# Altium PCB PCB.PcbDoc
Units mm, origin at the board's own origin, x right, y up, seen from the top; angles counter-clockwise.
Board outline 100.01 x 69.88 mm, 2 copper layers (Top Layer, Bottom Layer); 43 components, 85 nets, 137 pads, 95 vias.
Unrouted connection lines stored in the file: 41.
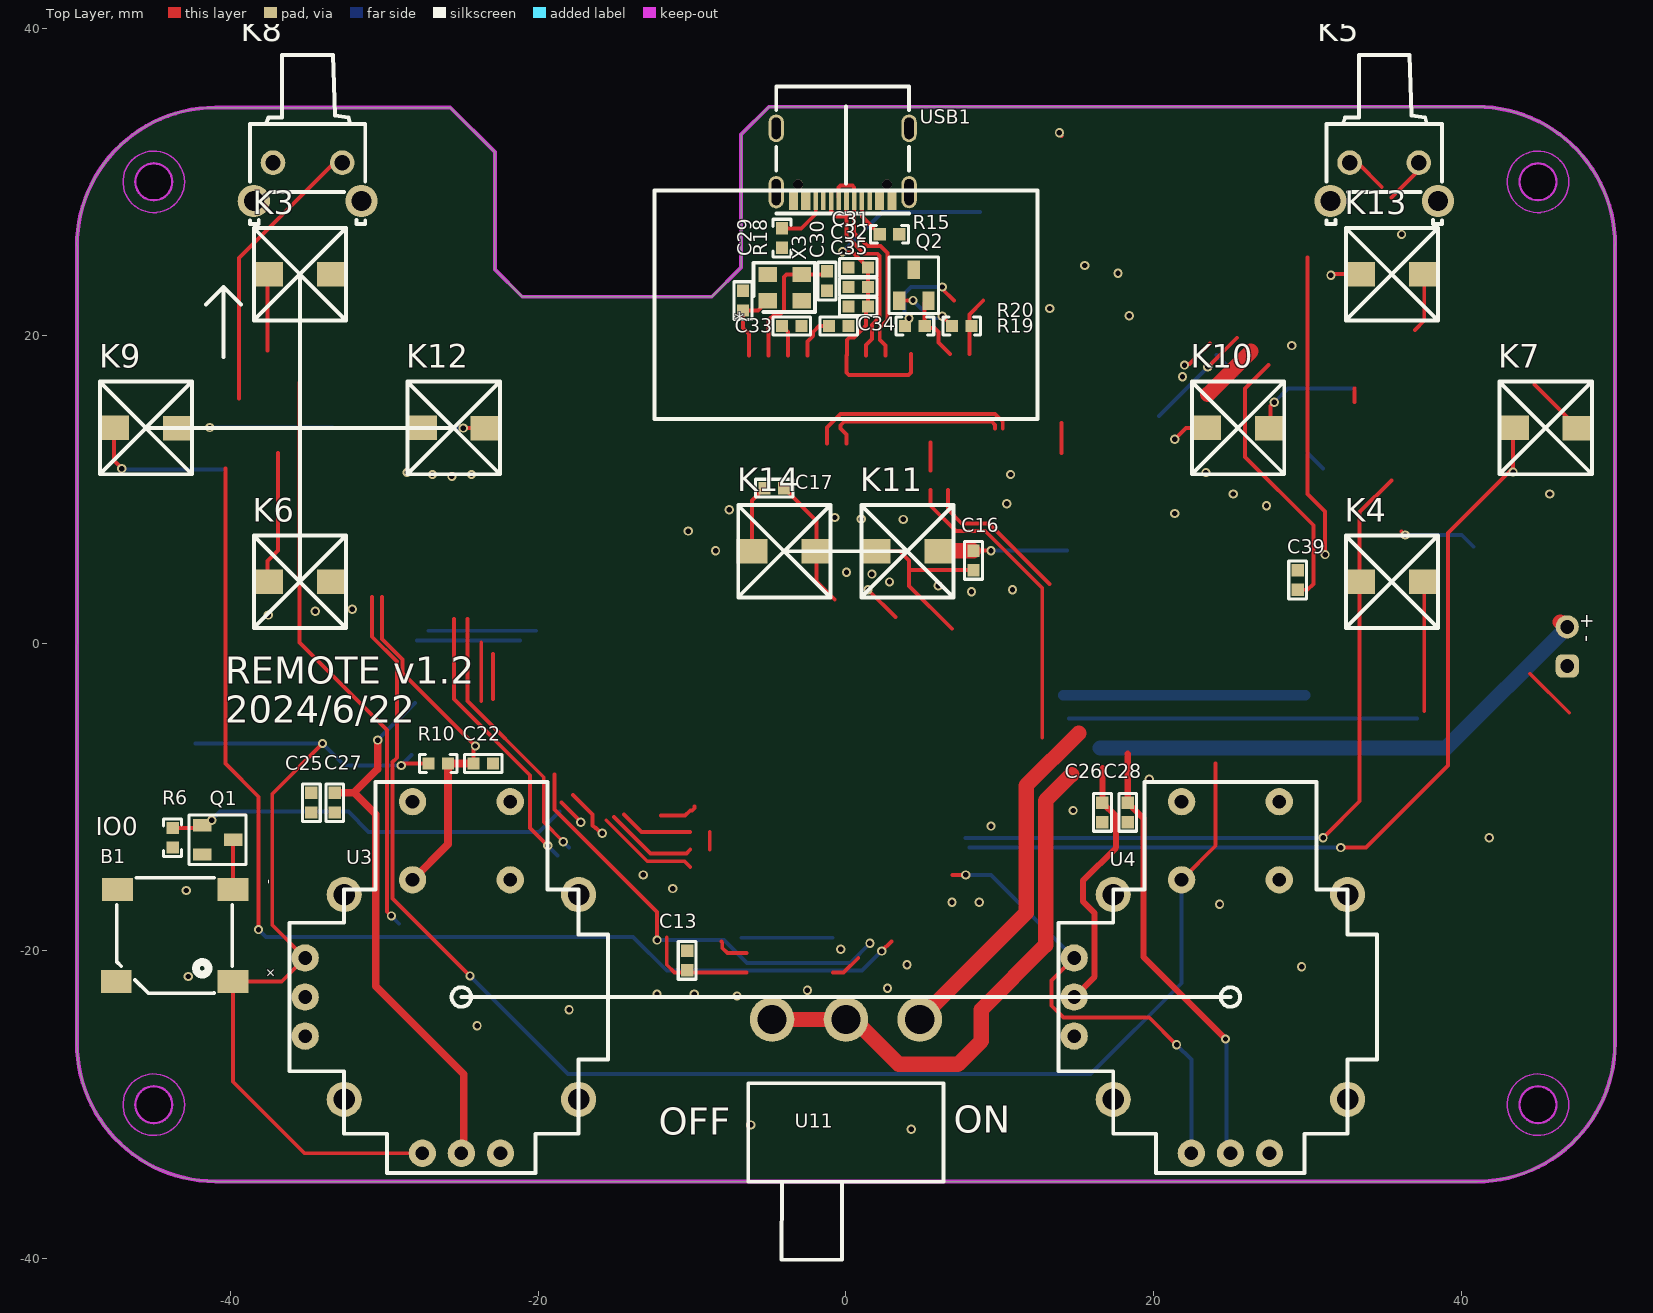
[diagram p0: Top Layer view]
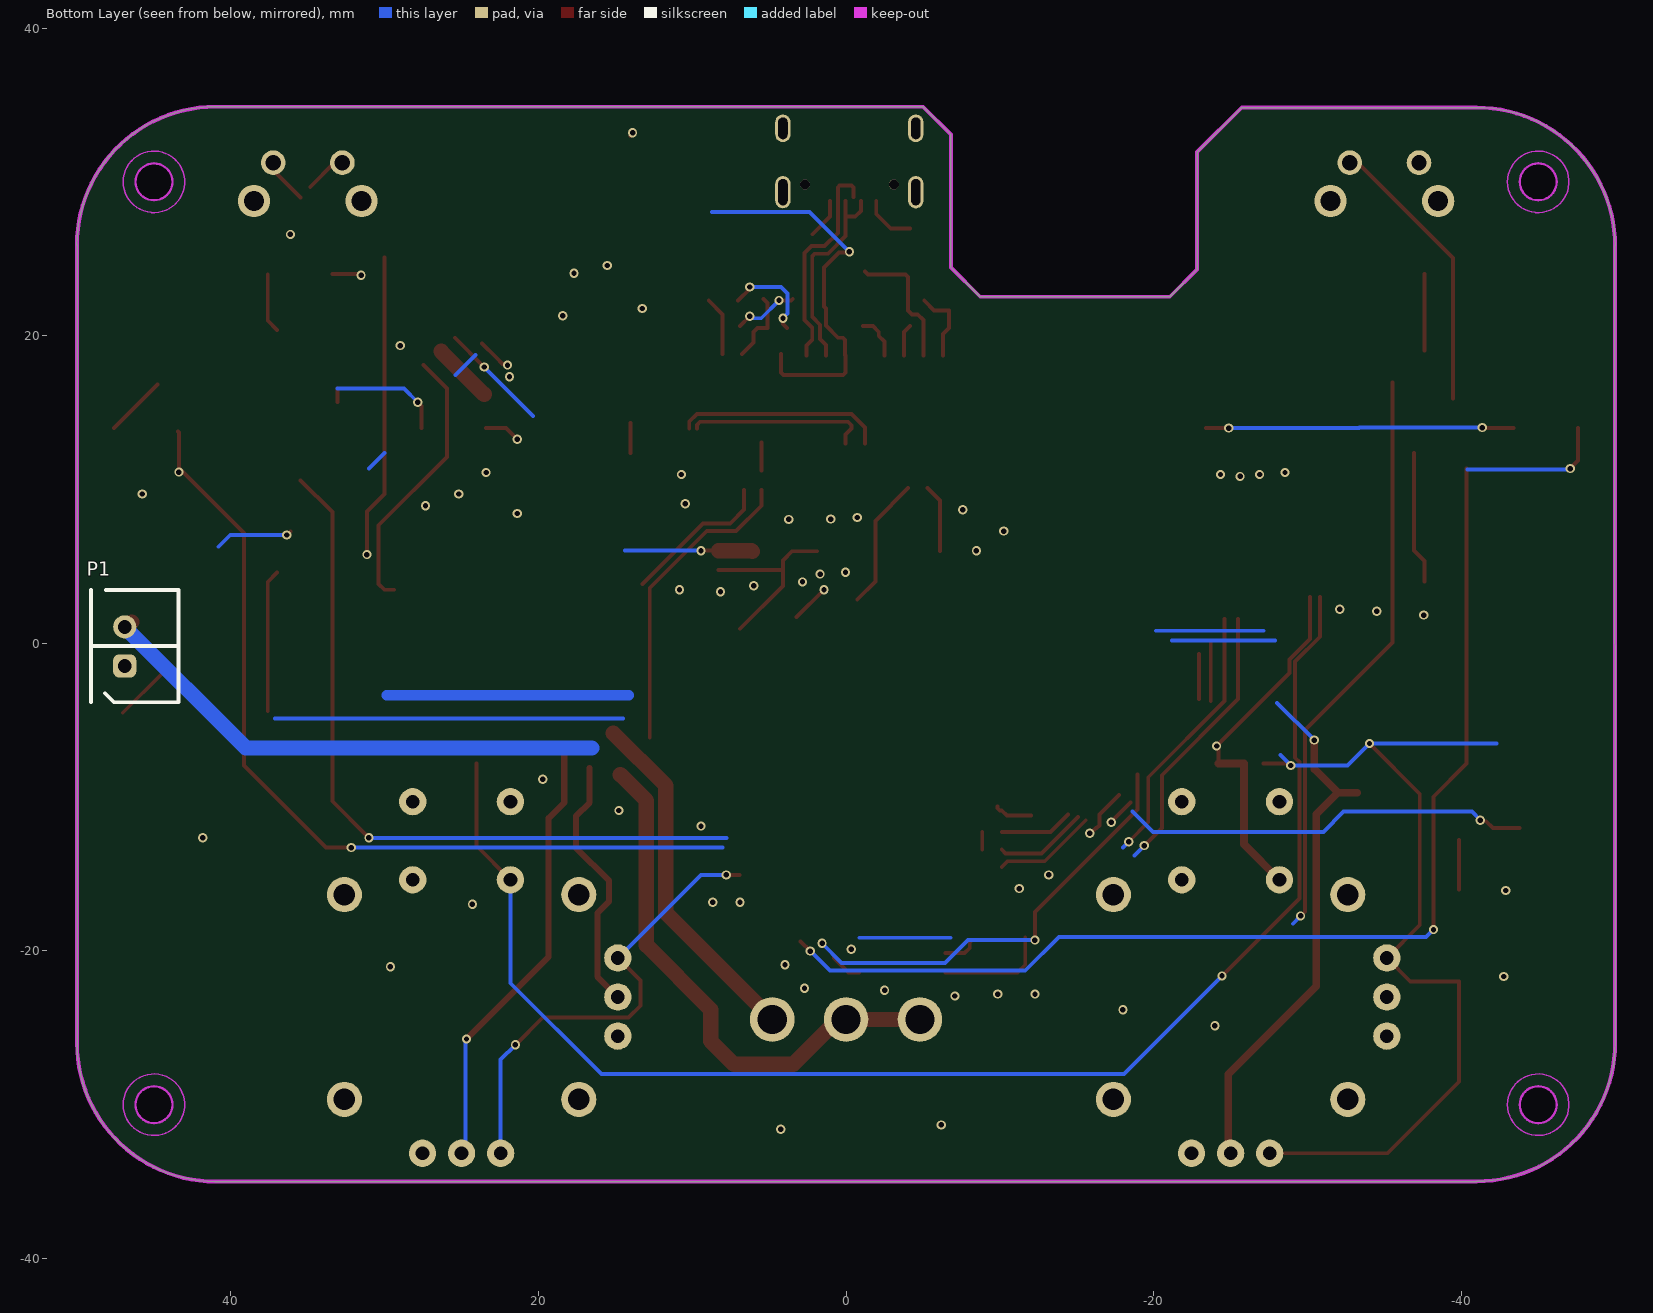
[diagram p1: Bottom Layer view, seen from below]
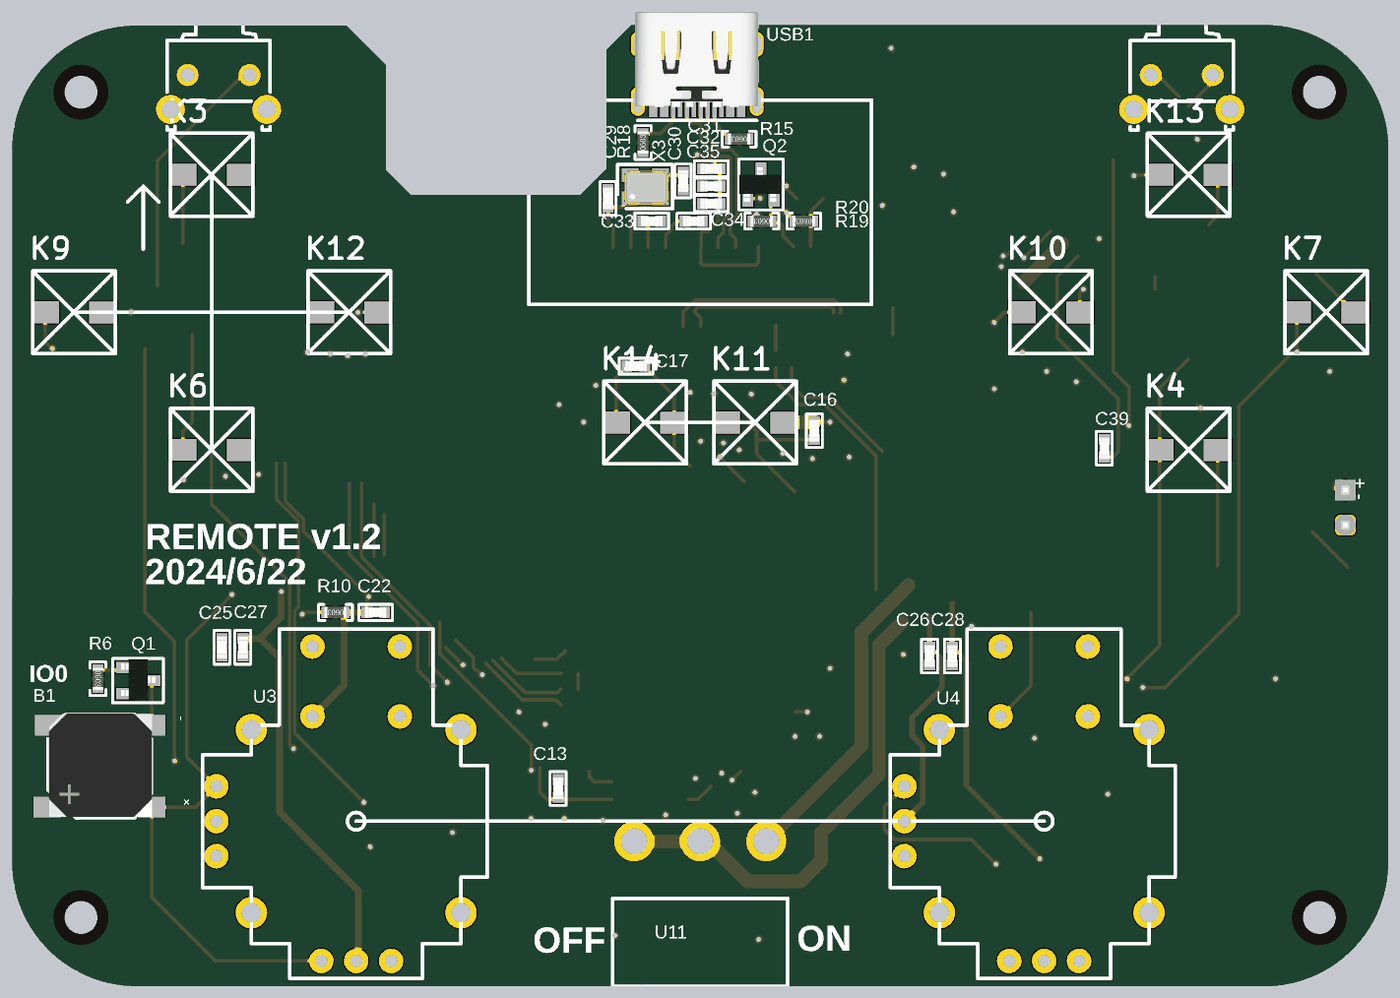
[diagram p2: 3D render of the assembled board from above, using the file's embedded part models]

## Layer stack, top to bottom
Top Solder: solder mask 0.0102, Solder Resist, Dk 3.5
Top Layer: signal copper 0.0356
Dielectric 1: dielectric 0.32, FR-4, Dk 4.8
Bottom Layer: signal copper 0.0356
Bottom Solder: solder mask 0.0102, Solder Resist, Dk 3.5

## Board outline
-50,-25.983 ccw(c-41,-25.983) -41,-34.983 -41,-35 41.059,-35 41,-35 ccw(c41,-26) 50,-26 50,25.895 50.011,25.884 ccw(c41.011,25.884) 41.011,34.884 -5.008,34.884 -6.82,33.072 -6.82,24.436 -8.725,22.531 -21.044,22.531 -22.822,24.309 -22.822,31.929 -25.726,34.833 -41,34.833 ccw(c-41,25.833) -50,25.833 -49.98,25.833
cut-out: 43.8,-30 ccw(c45,-30) 45,-31.2 ccw(c45,-30) 46.2,-30 ccw(c45,-30) 45,-28.8 ccw(c45,-30)
cut-out: -46.2,-30 ccw(c-45,-30) -45,-31.2 ccw(c-45,-30) -43.8,-30 ccw(c-45,-30) -45,-28.8 ccw(c-45,-30)
cut-out: -45,28.8 cw(c-45,30) -46.2,30 cw(c-45,30) -45,31.2 cw(c-45,30) -43.8,30 cw(c-45,30)
cut-out: 43.8,30 ccw(c45,30) 45,28.8 ccw(c45,30) 46.2,30 ccw(c45,30) 45,31.2 ccw(c45,30)

## Design rules (kind name [scope] priority, off if disabled: settings)
Clearance [All] p1: gap=0.1 ignorepadtopadclearanceinfootprint=FALSE except(0: Arc-Hole Track-Hole SMDPad-Hole THPad-Hole Via-Hole Fill-Hole Poly-Hole Region-Hole Text-Hole; 0.102: Arc-Arc Arc-Track Arc-SMDPad Arc-THPad Track-Track Track-SMDPad Track-THPad SMDPad-SMDPad SMDPad-THPad THPad-THPad; 0.127: Arc-Via Track-Via SMDPad-Via SMDPad-Text THPad-Via Via-Via; 0.254: Arc-Text Track-Text THPad-Text Via-Text Fill-Text Poly-Text Region-Text Text-Text)
DiffPairsRouting [All] p1: maxlimit=0.254 minlimit=0.1 mostfreqgap=0.254 toplayer_minwidth=0.2 toplayer_maxwidth=0.381 toplayer_prefwidth=0.25 bottomlayer_minwidth=0.2 bottomlayer_maxwidth=0.381 bottomlayer_prefwidth=0.25 maxuncoupledlength=12.7
HoleSize [All] p1: absolutevalues=TRUE maxlimit=30 minlimit=0.025 maxpercent=80.000 minpercent=20.000
HoleToHoleClearance [All] p1: gap=0.152 allowstackedmicrovias=TRUE
MinimumSolderMaskSliver [All] p1: minsoldermaskwidth=0
PlaneClearance [All] p1: clearance=0.254
PlaneConnect [All] p1: planeconnectstyle=Direct reliefexpansion=0.508 reliefentries=4 reliefconductorwidth=0.254 reliefairgap=0.254
PolygonConnect [All] p1: connectstyle=Direct reliefconductorwidth=0.254 reliefentries=4 polygonreliefangle="90 Angle" airgapwidth=0.254
RoutingVias [All] p1: holewidth=0.711 width=1.27 viastyle="Through Hole" minholewidth=0.3 minwidth=0.5 maxholewidth=30 maxwidth=30
SilkToSilkClearance [All] p1: silktosilkclearance=0
SilkToSolderMaskClearance [IsPad] p1: minsilkscreentomaskgap=0 clearancetoexposedcopper=TRUE
SolderMaskExpansion [All] p1: expansion=0.102 istentingtop=FALSE
Width [All] p1: maxlimit=3 minlimit=0.1 preferedwidth=0.254
22 further rules are at their usual default settings.

## Classes and differential pairs
component class Sheet0-mcu: C13
component class Sheet1-control: B1 C16 C17 C22 C25 C26 C27 C28 K3 K4 K5 K6 K7 K8 K9 K10 K11 K12 K13 K14 Q1 R6 R10 U3 U4
component class Sheet2-USB: C29 C30 C31 C32 C33 C34 C35 C39 P1 Q2 R15 R18 R19 R20 U11 USB1 X3
differential pair IO: +IO_P -IO_N
differential pair ESP32: +ESP32_P -ESP32_N
differential pair CH340: +CH340_P -CH340_N
differential pair USB: +USB_P -USB_N

## Components (designator, comment, footprint, x,y, rotation, side; value= is the part's Value field where it differs from the comment)
B1 "BUZZER1" BUZ-SMD_GSC7525RA -43.65,-18.998 r180 top
C13 "100NF" CC1608-0603 -10.321,-20.621 r270 top
C16 "100PF" CC1608-0603 8.293,5.386 r90 top
C17 "100PF" CC1608-0603 -4.661,10.085 r0 top
C22 "100nF" CC1608-0603 -23.584,-7.822 r180 top
C25 "100nF" CC1608-0603 -34.76,-10.362 r90 top
C26 "100nF" CC1608-0603 16.675,-10.997 r90 top
C27 "100pF" CC1608-0603 -33.236,-10.362 r90 top
C28 "100pF" CC1608-0603 18.326,-10.997 r90 top
C29 "20pF" CC1608-0603 -6.693,22.277 r270 top
C30 "20pF" CC1608-0603 -1.232,23.547 r90 top
C31 "1uF" CC1608-0603 0.8,24.436 r0 top
C32 "100NF" CC1608-0603 0.8,23.166 r0 top
C33 "10UF" CC1608-0603 -3.518,20.626 r180 top
C34 "10UF" CC1608-0603 -0.47,20.626 r180 top
C35 "100NF" CC1608-0603 0.8,21.896 r0 top
C39 "22PF" CC1608-0603 29.375,4.116 r270 top
K3 "KEY 6*6*5" "KEY 6*6*5" -35.5,24 r0 top
K4 "KEY 6*6*5" "KEY 6*6*5" 35.5,4 r0 top
K5 "SW-TH_4P_H" SW-TH_KH-6X6X7H-ZJ 35,30 r0 top
K6 "KEY 6*6*5" "KEY 6*6*5" -35.5,4 r0 top
K7 "KEY 6*6*5" "KEY 6*6*5" 45.5,14 r0 top
K8 "SW-TH_4P_H" SW-TH_KH-6X6X7H-ZJ -35,30 r0 top
K9 "KEY 6*6*5" "KEY 6*6*5" -45.5,14 r0 top
K10 "KEY 6*6*5" "KEY 6*6*5" 25.5,14 r0 top
K11 "KEY 6*6*5" "KEY 6*6*5" 4,5.983 r0 top
K12 "KEY 6*6*5" "KEY 6*6*5" -25.5,14 r0 top
K13 "KEY 6*6*5" "KEY 6*6*5" 35.5,24 r0 top
K14 "KEY 6*6*5" "KEY 6*6*5" -4,5.983 r0 top
P1 "Header 2" HX2.54-2 46.901,-1.472 r90 bottom locked
Q1 "SI2302" SOT-23 -41.86,-11.825 r270 top
Q2 "S8050" SOT-23 3.465,22.277 r0 top
R6 "33KR" CR1608-0603 -43.777,-12.648 r270 top
R10 "10K" CR1608-0603 -26.505,-7.822 r180 top
R15 "5.1K" CR1608-0603 2.832,26.595 r180 top
R18 "5.1K" CR1608-0603 -4.153,26.341 r90 top
R19 "12K/10K" CR1608-0603 7.531,20.626 r180 top
R20 "12K/10K" CR1608-0603 4.483,20.626 r180 top
U3 "rocker" PCBComponent_1 -25,-23 r0 top locked
U4 "rocker" PCBComponent_1 25,-23 r0 top locked
U11 "HX SS12D10G4" SW-TH_3P-SS12D06 0,-24.459 r0 top locked
USB1 "Tpye-c 16P" "TYPE-C 16P" -3.102,29.829 r180 top locked
X3 "3225_12M" XTAL-3225 -5.083,23.977 r0 top

## Footprints (in the part's own frame and the unit in brackets; to place one, negate y for a bottom-side part, rotate by r counter-clockwise, add the part's x,y. Pads: shape width x height; smd on the part's side, far side on the other; paste and mask are expansions set on the pad)
BUZ-SMD_GSC7525RA [mm]
  rect 2x1.5 smd paste+0 mask+0.051: 1(-3.795,2.98) 2(-3.795,-2.98) 3(3.705,-2.98) 3(3.795,2.98)
  silkscreen extent -3.75,-3.75 3.76,3.76, body extent -3.81,-3.81 3.69,3.69, height 2.5
CC1608-0603 [mm]
  rect 0.8x0.8 smd: 1(-0.635,0) 2(0.635,0)
  silkscreen extent -1.23,-0.58 1.23,0.58, body extent -0.8,-0.4 0.8,0.4, height 0.3
CR1608-0603 [mm]
  rect 0.8x0.8 smd: 1(-0.635,0) 2(0.635,0)
  silkscreen extent -1.23,-0.58 1.23,0.58, body extent -0.8,-0.4 0.8,0.4, height 0.45
HX2.54-2 [mm] "两针白色插座（已加焊）"
  rrect50% 1.5x1.5 hole 0.9: 1(0,0)
  round 1.5 hole 0.9: 2(2.54,0)
  silkscreen extent -2.36,-3.5 4.94,2.2, body extent -2.48,-3.55 5.02,2.45, height 7
"KEY 6*6*5" [mm] "无声微动开关"
  rect 2x1.6 smd: 1(-2.1,0) 2(2.1,-0.013)
  silkscreen extent -3,-3.01 3,3.01, body extent -3.32,-3.05 3.33,3.05, height 5
PCBComponent_1 [mil]
  round 70 hole 35.4 paste+0 mask+4: 1(-125,500) 2(125,500) 3(-125,300) 4(125,300)
  round 70 hole 35 paste+0 mask+4: 5(-400,100) 6(-400,0) 7(-400,-100) 8(-100,-400) 9(0,-400) 10(100,-400)
  round 90 hole 55 paste+0 mask+4: MOUNT1(-300,262) MOUNT2(-300,-262) MOUNT3(300,-262) MOUNT4(300,262)
  silkscreen extent -440,-450 375,550, body extent -447,-446 290,535, height 772
SOT-23 [mm]
  rect 0.8x1.2 smd: 1(0,0) 2(1.905,0) 3(0.95,2.02)
  silkscreen extent -0.66,-0.84 2.57,2.84, body extent -0.61,-0.23 2.39,2.27, height 1.05
SW-TH_3P-SS12D06 [mm]
  round 2.9 hole 1.9 paste+0 mask+0.051: 1(-4.8,0) 2(0,0) 3(4.8,0)
  silkscreen extent -6.35,-15.62 6.35,-4.15, body extent -6.35,-15.68 6.35,-4.19, height 6.7
SW-TH_KH-6X6X7H-ZJ [mm]
  round 1.6 hole 1 paste+0 mask+0.05: 1(2.25,1.25) 2(-2.25,1.25)
  round 2.1 hole 1.3 paste+0 mask+0.05: 3(3.5,-1.25) 4(-3.5,-1.25)
  silkscreen extent -3.75,-2.75 3.75,8.25, body extent -3.75,-2.48 3.75,5.67, height 7.5
"TYPE-C 16P" [mm]
  oval 1x2.099 hole 0.6 slot 1.7 at 90 deg: 1(-7.21,0.5) 2(1.43,0.5)
  oval 1x1.799 hole 0.6 slot 1.4 at 90 deg: 3(-7.21,-3.65) 4(1.43,-3.65)
  rect 0.6x1.15 smd: A1B12(-6.09,1.075) A4B9(-5.29,1.075) B1A12(0.31,1.075) B4A9(-0.49,1.075)
  rect 0.3x1.15 smd: A5(-4.14,1.075) A6(-3.14,1.075) A7(-2.64,1.075) A8(-1.64,1.075) B5(-1.14,1.075) B6(-2.14,1.075) B7(-3.64,1.075) B8(-4.64,1.075)
  round 0.65 hole 0.65 unplated: ""(-5.78,0) ""(0,0)
  silkscreen extent -7.21,-6.37 1.43,1.89, body extent -7.31,-6 1.63,0.9, height 3.18
XTAL-3225 [mm]
  rect 1.2x1 smd: 1(0,-1.7) 2(2.2,-1.7) 3(2.2,0) 4(0,0)
  silkscreen extent -0.91,-2.44 3.07,0.76, body extent -0.43,-2.15 2.77,0.35, height 0.61

## Part data
B1: "2700Hz", Manufacturer=INGHAi(赢海), Manufacturer Part=GSC7525RA-16R2700, Contributor=LCSC, nameAlias=Value, spicePre=B, spiceSymbolName=GSC7525RA-16R2700, Supplier=LCSC, Supplier Part=C255313
C13 C16 C17 C22 C25 C26 C27 C28 C29 C30 C31 C32 C33 C34 C35 C39: library part "Cap Chip 0603", "0603封装的电容", Published=8-Jun-2000, Publisher="Altium Limited", Revision="July-2002: Re-released for DXP Platform."
K3 K4 K6 K7 K9 K10 K11 K12 K13 K14: "无声轻触开关"
K5 K8: "卧式轻触开关"
P1: "Header, 2-Pin", LatestRevisionDate=17-Jul-2002, LatestRevisionNote="Re-released for DXP Platform.", Publisher="Altium Limited"
Q1: "N沟道  / 漏源电压(Vdss) 20V  / 连续漏极电流(Id) 2.8A  / 功率(Pd) 900mW  / 导通电阻(RDS(on)@Vgs,Id) 55mΩ@4.5V,2.8A  / 阈值电压(Vgs(th)@Id) 1.2V@250uA  / 输入电容(Ciss@Vds) 260pF@10V", JLCPCB Part Class="Extended Part", Manufacturer=TWGMC(台湾迪嘉), Manufacturer Part=SI2306, Contributor=LCSC, spicePre=Q, spiceSymbolName=SI2306_C727154, Supplier=LCSC, Supplier Part=C727154
Q2: Manufacturer=SALLTECH(萨瑞), Contributor=lcsc, Manufacturer Part=S8050, spicePre=Q, spiceSymbolName=S8050_C3027096, Supplier=LCSC, Supplier Part=C3027096
R6: library part "Chip resistor", "贴片电阻"
R10 R15 R18 R19 R20: library part "Resistor Chip 0603", "0603封装电阻", Published=8-Jun-2000, Publisher="Altium Limited", Revision="July-2002: Re-released for DXP Platform."
U3 U4: Manufacturer Part=摇杆, Contributor=Alex_Ai, spicePre=U, spiceSymbolName="摇杆_直插_圆半径13_10电气脚_4固定脚 COPY"
U11: library part SW-TH_3P-SS12D06, BOM_JLCPCB Part Class="Extended Part", BOM_Manufacturer=hanxia(韩下), BOM_Manufacturer Part="HX SS12D10G4", BOM_Supplier=LCSC, BOM_Supplier Part=C5149841, Contributor=lcsc, link=https://atta.szlcsc.com/upload/public/pdf/source/20220907/2020D7183ED16DD6E2B9F5A13FB144CF.pdf, spicePre=U, spiceSymbolName="HX SS12D10G4"
USB1: "16P 封装的TYPE -c接口 4固定插脚 双向"
X3: library part "XTAL 3225", "3225封装的晶振"

## Via types
v1: diameter 0.6, hole 0.35, Top Layer to Bottom Layer, tented both sides, 95 vias

## Nets (pads, with @x,y where several pads share a name; then routed paths per layer and width w, separated by ;. In a path a pad name is that pad's centre, name@x,y a point inside that pad or via, vN(x,y) a via of type N, cw(c..) or ccw(c..) an arc to the next point about the centre after c; other vN are vias at no path point)
3.3V: B1.1 C17.2 C39.2 K14.2 R10.2 U3.5 U3.8 U4.5 U4.8 | length 136.3
  Top Layer w0.254: v1(-34.031,-6.519) -37.3,-9.788 -37.3,-18.32 U3.5 -36.678,-21.978 B1.1 -39.855,-28.508 -35.203,-33.16 U3.8 ; v1@-28.697,-7.822 R10.2 ; -14.44,-11.124 -13.297,-12.267 -10.122,-12.267 ; C17.2 -1.9,7.959 K14.2 -1.9,4.022 -0.724,2.846 ; 6.923,-15.061 v1(7.785,-15.061) ; U4.5 14.84,-20.466 13.373,-21.933 13.373,-23.57 14.135,-24.332 19.723,-24.332 v1(21.501,-26.11) ; 27.47,18.086 25.946,16.562 25.946,12.117 30.391,7.672 30.391,3.862 30.01,3.481 C39.2
  Bottom Layer w0.254: -42.286,-6.519 v1(-34.031,-6.519) -32.601,-7.949 v1(-28.918,-7.949) -28.237,-7.268 ; v1(7.785,-15.061) 9.441,-15.061 U4.5 ; v1(21.501,-26.11) 22.46,-27.069 U4.8
  Bottom Layer w0.66: 14.135,-3.377 29.883,-3.377
5V:  | length 4
  Top Layer w1: 23.533,16.181 26.327,18.975
ADC_BAT: 
ADC_LX: C25.2 U3.6
ADC_LY: C27.2 U3.9 | length 35.2
  Top Layer w0.5: C27.2 -31.999,-9.727 ; v1(-30.442,-6.298) -30.442,-8.17 -31.999,-9.727 ; U3.9 -24.854,-33.014 -24.854,-28.015 -30.569,-22.3 -30.569,-11.124 -31.966,-9.727 -31.999,-9.727
  Bottom Layer w0.254: v1(-30.442,-6.298) -28.029,-3.885
ADC_RX: C26.2 U4.6 | length 17
  Top Layer w0.4: U4.6 16.167,-21.673 16.167,-17.537 15.405,-16.775 15.405,-15.442 17.564,-13.283 17.564,-11.251 C26.2 16.675,-8.129
ADC_RY: C28.2 U4.9 | length 28.7
  Top Layer w0.4: 18.326,-7.187 C28.2 19.342,-11.378 19.342,-20.395 v1(24.676,-25.729)
  Bottom Layer w0.254: v1(24.676,-25.729) 24.742,-25.795 24.742,-32.902 U4.9
BAT: C16.2 K11.2 U11.3 | length 31.2
  Top Layer w0.254: C16.2 v1(9.436,6.021)
  Top Layer w1: U11.3 11.722,-17.537 11.722,-9.258 15.14,-5.84 ; K11.2 6.151,6.021 C16.2
  Bottom Layer w0.254: v1(9.436,6.021) 14.389,6.021
BEEP: Q1.1 R6.1 | length 26.7
  Top Layer w0.254: R6.1 -42.048,-12.013 -41.606,-11.571 -41.397,-11.571 -41.331,-11.505 v1(-41.237,-11.505)
  Bottom Layer w0.254: v1(-41.237,-11.505) -40.683,-10.951 -32.347,-10.951 -31.031,-12.267 -19.947,-12.267 -18.631,-10.951
CH340_N:  | length 13.5
  Top Layer w0.254: -1.232,12.976 -1.232,14.022 -0.87,14.384 -0.343,14.911 9.698,14.911 10.198,14.411 10.198,13.949
CH340_P:  | length 11.8
  Top Layer w0.254: 0.038,12.976 0.038,13.562 -0.362,13.963 -0.362,14.173 -0.133,14.403 9.488,14.403 9.69,14.201 9.69,13.949
CHIP_PU: Q2.3
DTR: R19.1 | length 3.8
  Top Layer w0.254: 8.039,18.8 8.039,20.499 8.039,21.388 8.928,22.277
EN: 
ESP32_N:  | length 6
  Top Layer w0.254: -15.075,-11.295 -12.706,-13.664 -10.376,-13.664 -10.122,-13.41
ESP32_P:  | length 6.7
  Top Layer w0.254: -15.583,-11.505 -12.916,-14.172 -10.503,-14.172 -10.122,-14.553
GND: C13.1 C22.1 C25.1 C26.1 C27.1 C28.1 C29.1 C30.1 C31.1 C32.1 C33.1 C34.1 C35.1 P1.1 Q1.2 R6.2 R15.1 R18.1 U3.1 U3.7 U3.10 U4.1 U4.7 U4.10 USB1.1 USB1.2 USB1.3 USB1.4 USB1.A1B12 USB1.B1A12 X3.2 X3.4
  other v1: 4.252,-31.599 -6.185,-31.317 -23.978,-24.862 -17.996,-23.824 -7.074,-22.935 -12.281,-22.808 -9.868,-22.808 -2.502,-22.554 2.705,-22.427 -42.761,-21.665 29.629,-21.03 3.975,-20.903 24.295,-16.966 6.896,-16.839 8.674,-16.839 -42.888,-16.077 -11.265,-15.95 -13.17,-15.061 41.821,-12.648 9.436,-11.886 14.77,-10.87 19.723,-8.838 -37.554,1.83 -34.506,2.084 -32.093,2.211 8.166,3.354 10.833,3.481 6.007,3.735 2.832,3.989 1.689,4.497 0.038,4.624 -8.471,6.021 -10.249,7.291 3.721,8.053 1,8.073 -0.724,8.18 21.374,8.434 -7.582,8.688 27.343,8.942 10.452,9.069 25.184,9.704 45.758,9.704 -25.616,10.847 -26.886,10.974 -24.346,10.974 10.706,10.974 -28.537,11.101 23.406,11.101 21.882,17.324 28.994,19.356 13.246,21.769 17.691,24.055 15.532,24.563
GPIO0: 
GT_24_CSN: 
GT_24_IRQ: 
IIC_SCL:  | length 18.2
  Top Layer w0.254: -25.489,1.576 -25.489,-3.631 -20.536,-8.584 -20.536,-12.013 v1(-19.393,-13.156)
  Bottom Layer w0.254: v1(-19.393,-13.156) -18.758,-13.791
IIC_SDA:  | length 17.6
  Top Layer w0.254: -24.6,1.576 -24.6,-3.758 -19.647,-8.711 -19.647,-11.632 v1(-18.377,-12.902)
  Bottom Layer w0.254: v1(-18.377,-12.902) -17.996,-13.283
IO_N:  | length 1.1
  Top Layer w0.254: -8.852,-13.41 -8.852,-12.267
IO_P: 
KET_y: K12.1 K13.1 | length 34.2
  Top Layer w0.254: -23.711,-3.758 -23.711,0.052 ; -18.936,-8.533 -18.936,-10.819 -12.276,-17.479 v1(-12.276,-19.298) ; v1(31.534,23.928) 31.606,24 K13.1
  Bottom Layer w0.254: v1(-12.276,-19.298) -7.917,-19.298 -6.439,-20.776 0.292,-20.776 v1(1.562,-19.506)
KEY_1: C22.2 R10.1 U3.3 | length 23.6
  Top Layer w0.254: -30.162,3.021 -30.162,0.275 -28.842,-1.045 -28.842,-1.929 v1(-24.092,-6.679) -24.092,-6.773 -24.219,-6.9 C22.2
  Top Layer w0.5: U3.3 -25.87,-13.075 R10.1 C22.2
kEY_2: U4.3 | length 94.1
  Top Layer w0.254: -30.812,3.021 -30.812,0.422 -29.197,-1.193 -29.197,-7.445 -29.472,-7.72 -29.472,-16.6 v1(-24.444,-21.628) ; U4.3 24.041,-13.164 24.041,-7.822
  Bottom Layer w0.254: v1(-24.444,-21.628) -18.057,-28.015 15.913,-28.015 21.825,-22.103 U4.3
KEY_a: K3.1 K4.1 K5.1 | length 100.1
  Top Layer w0.254: -37.6,19.021 K3.1 ; -35.522,16.943 -35.522,0.052 -29.828,-5.642 -29.828,-17.453 v1(-29.553,-17.728) ; v1@31.153,-12.521 33.4,-10.274 K4.1 33.4,8.522 35.471,10.593 ; 35.471,28.971 K5.1@37.75,31.25
  Bottom Layer w0.254: v1(-29.553,-17.728) -29.045,-18.236 ; -6.795,-19.143 -0.869,-19.143 ; 7.785,-12.648 v1(31.026,-12.648)
KEY_b: K6.1 K7.1 K8.1 | length 85
  Top Layer w0.254: -39.459,15.927 -39.459,25.041 K8.1@-33.25,31.25 ; K6.1 -37.6,5.34 -36.919,6.021 -36.919,12.371 ; v1(32.169,-13.283) 33.82,-13.283 39.154,-7.949 39.154,7.164 v1@43.345,11.355 ; v1(43.379,11.131) 43.379,13.721 K7.1@43.434,13.776
  Bottom Layer w0.254: 8.039,-13.283 v1(32.169,-13.283) ; 30.01,12.371 31.026,11.355
KEY_DOWN_1: K3.2 K6.2 K9.2 K12.2 | length 20
  Top Layer w0.254: K9.2 v1@-41.399,13.987 ; v1(-24.875,13.987) K12.2
  Bottom Layer w0.254: v1(-41.364,14.022) -33.363,14.022 ; -33.346,14.005 -24.892,14.005 v1(-24.875,13.987) v1@-24.84,14.022
KEY_DOWN_2: K4.2 K7.2 K10.2 K13.2 | length 48
  Top Layer w0.254: K10.2 27.6,15.422 v1(27.851,15.673) ; 33.058,15.683 33.058,16.562 ; K4.2@36.995,4.592 K4.2 37.6,-4.423 ; 36.995,20.372 37.6,20.977 K13.2 ; 44.771,16.816 K7.2
  Bottom Layer w0.254: 14.516,-4.901 37.122,-4.901 ; v1(27.851,15.673) 28.74,16.562 33.058,16.562
KEY_DOWN_3: K5.2 K8.2 | length 7.5
  Top Layer w0.254: -17.742,-9.854 -16.472,-11.124 -16.472,-11.84 -16.292,-12.02 -16.259,-12.02 -15.931,-12.348 v1(-15.837,-12.348) ; K5.2@33.25,31.25 34.836,29.664
  Bottom Layer w0.254: v1(-15.837,-12.348) v1@-15.78,-12.405 ; 24.104,18.73 25.382,17.451
KEY_left: K9.1 K10.1 | length 85.8
  Top Layer w0.254: K9.1 -47.6,11.876 v1(-47.079,11.355) ; -40.348,11.355 -40.348,-7.822 -38.189,-9.981 v1(-38.189,-18.617) ; v1(2.324,-20.014) 2.959,-19.379 ; v1(21.374,13.26) 22.114,14 K10.1
  Bottom Layer w0.254: v1(-47.079,11.355) -47.033,11.309 -40.394,11.309 ; v1(-38.189,-18.617) -37.706,-19.1 -13.83,-19.1 -11.646,-21.284 1.054,-21.284 v1(2.324,-20.014)
KEY_OUT: C16.1 K11.1 | length 12.2
  Top Layer w0.254: K11.1 3.505,5.983 4.102,5.386 4.102,4.751 ; 6.896,0.941 4.102,3.735 4.102,4.751 ; C16.1 4.102,4.751
KEY_select: C17.1 K14.1 | length 4.4
  Top Layer w0.254: K14.1 -6.1,9.281 C17.1
KEY_start:  | length 9.7
  Top Layer w0.254: v1(1.435,3.481) 3.213,1.703
  Bottom Layer w0.254: -27.14,0.814 -20.155,0.814 ; v1@1.308,3.354 v1(1.435,3.481)
KEY_USB:  | length 24.5
  Top Layer w0.254: -22.949,-3.641 -22.949,-0.71 ; -18.504,-10.362 v1(-17.234,-11.632) ; 30.01,25.071 30.01,9.704 31.153,8.561 v1(31.153,5.767)
  Bottom Layer w0.254: v1(-17.234,-11.632) v1@-17.216,-11.65
LCD_LEDA: 
LCD_REST:  | length 0
  Top Layer w0.254: v1(18.415,21.298) v1@18.44,21.273
LCD_RS:  | length 4.2
  Top Layer w0.254: 14.008,12.371 14.008,14.322 ; v1(22.017,18.086) 22.083,18.152 22.329,18.152 22.741,18.564 23.66,19.483
NetA1_1: 
NetB1_2: B1.2 Q1.3 | length 3.2
  Top Layer w0.254: B1.2 -39.855,-12.79 Q1.3
NetC33_2: C33.2 | length 2.1
  Top Layer w0.254: C33.2 -3.772,20.245 -3.772,18.721
NetC34_2: C34.2 | length 2.9
  Top Layer w0.254: -2.502,18.721 -2.502,19.61 -2.121,19.991 -2.121,20.245 -1.74,20.626 C34.2
NetC36_2: 
NetC39_1: C39.1
NetD2_2: 
NetL2_1: 
"NetLED 1_1": 
"NetLED 1_2":  | length 3.6
  Top Layer w0.254: 44.488,-1.98 47.028,-4.52
NetP1_2: P1.2 U11.1 U11.2 | length 69.4
  Top Layer w1: U11.1 U11.2 0.526,-24.459 3.447,-27.38 7.277,-27.38 8.801,-25.856 8.801,-23.824 12.992,-19.633 12.992,-10.235 14.681,-8.546 ; P1.2@46.451,1.383 46.766,1.068 P1.2
  Bottom Layer w1: 16.548,-6.806 39.027,-6.806 P1.2
NetQ2_1: Q2.1 R19.2 | length 4.1
  Top Layer w0.254: Q2.1@3.465,22.38 3.569,22.277 v1@4.356,22.277 ; v1(6.261,21.261) R19.2
  Bottom Layer w0.254: v1(4.36,22.291) 5.517,21.134 v1@6.134,21.134
NetQ3_1: R20.2 | length 6.3
  Top Layer w0.254: R20.2@3.848,20.499 4.102,20.753 v1(4.102,21.134) ; v1(6.261,23.166) 6.261,23.039 7.023,22.277
  Bottom Layer w0.254: v1(4.102,21.134) 3.806,21.43 3.806,22.743 4.229,23.166 v1(6.261,23.166)
NetR14_2: 
NetR15_2: R15.2 USB1.A5 | length 2.6
  Top Layer w0.254: USB1.A5 1.038,27.746 2.189,26.595 R15.2
NetR16_1:  | length 1.8
  Top Layer w0.254: 5.499,11.228 5.499,13.054
NetR17_1: 
NetR18_2: R18.2 USB1.B5 | length 3.4
  Top Layer w0.254: R18.2 -2.905,26.976 -1.962,27.919 USB1.B5
NetR22_1: 
NetR24_1: 
POWER_EN:  | length 6.7
  Bottom Layer w0.254: -27.902,0.179 -21.171,0.179
RTS: Q2.2 R20.1 | length 4.7
  Top Layer w0.254: Q2.2@5.37,22.38 5.118,22.128 5.118,20.499 5.753,20.499 6.008,20.244 6.008,19.561 6.769,18.8
SPI2_CLK: 
SPI2_CS0:  | length 7.2
  Top Layer w0.254: v1(23.533,17.959) 25.438,19.864
  Bottom Layer w0.254: 20.358,14.784 v1(23.533,17.959)
SPI2_CS1: 
SPI2_MISO: 
SPI2_MOSI: 
SPICLK: 
SPICS0:  | length 2
  Top Layer w0.254: -0.845,-21.411 -0.15,-21.411 0.8,-20.462
SPID: 
SPIHD:  | length 2.2
  Top Layer w0.254: -8.09,-19.395 -8.042,-19.443 -8.042,-19.808 -7.709,-20.141 -6.445,-20.141
SPIQ: 
  other v1: -0.343,-19.887
SPIWP: 
U0RXD:  | length 20.2
  Top Layer w0.254: 5.499,9.958 5.499,8.942 7.15,7.291 9.06,7.291 12.763,3.588 12.763,-6.146
U0TXD:  | length 9.9
  Top Layer w0.254: 6.642,9.958 6.642,8.688 7.531,7.799 9.309,7.799 13.246,3.862
"USB 5V": C31.2 C32.2 C35.2 USB1.A4B9 USB1.B4A9 | length 30.6
  Top Layer w0.254: v1(-0.216,25.452) -0.17,25.406 0.465,25.406 C31.2 C32.2 C35.2 1.311,21.772 1.311,20.648 0.526,19.864 0.212,19.864 0.063,19.715 0.063,18.746 0.038,18.721 0.038,17.6 0.187,17.451 4.08,17.451 4.229,17.6 4.229,18.8 ; v1(13.881,33.199) 13.881,33.105 v1@14.008,32.978 ; 36.129,7.268 v1(36.36,7.037)
  Bottom Layer w0.254: v1(-0.216,25.452) 2.383,28.051 8.733,28.051 ; v1(36.36,7.037) 40.043,7.037 40.805,6.275
  other v1: 36.129,26.583
USB_N: USB1.A7 USB1.B7 | length 14.4
  Top Layer w0.254: USB1.A7@-0.47,29.008 -0.47,29.643 -0.343,29.77 0.419,29.77 0.538,29.651 USB1.B7 0.538,27.738 0.538,26.686 1.391,25.833 2.259,25.833 2.705,25.387 2.705,21.007 2.197,20.499 2.197,19.737 2.578,19.356 2.578,18.721
USB_P: USB1.A6 USB1.B6 | length 13.6
  Top Layer w0.254: USB1.B6 -0.962,28.103 -0.597,27.738 0.03,27.738 ; USB1.A6@0.03,28.754 0.03,27.738 ; 1.308,18.721 1.308,19.396 1.689,19.777 1.689,20.709 2.197,21.217 2.197,25.176 2.048,25.325 1.181,25.325 0.03,26.476 0.03,27.738
VDD_SPI: C13.2 | length 7.2
  Top Layer w0.254: -11.646,-19.125 -11.646,-20.903 -11.138,-21.411 -6.445,-21.411
XH32_N:  | length 2.5
  Top Layer w0.254: -12.027,-11.211 -10.463,-11.211 -10.122,-10.87 -9.995,-10.87 -9.849,-10.724 -9.849,-10.597
XH32_P: 
XH_N: 
XH_P: 
XIN: C29.2 X3.1 | length 5
  Top Layer w0.254: -6.312,18.721 -6.312,20.118 -6.693,20.499 C29.2 -5.718,21.642 X3.1
XOUT: C30.2 X3.3 | length 8.7
  Top Layer w0.254: -5.042,18.721 -5.042,21.007 -4.661,21.388 -4.28,21.388 -4.026,21.642 -4.026,23.801 -3.85,23.977 X3.3 -1.437,23.977 C30.2
pads on no net: B1.3 K5.3 K5.4 K8.3 K8.4 U3.2 U3.4 U3.MOUNT1 U3.MOUNT2 U3.MOUNT3 U3.MOUNT4 U4.2 U4.4 U4.MOUNT1 U4.MOUNT2 U4.MOUNT3 U4.MOUNT4 USB1. USB1.A8 USB1.B8

## Keep-outs
Keep-Out Layer:
  circle w0.1: c45,30 r2
  circle w0.1: c45,-30 r2
  circle w0.1: c-45,-30 r2
  circle w0.1: c-45,30 r2
  circle w0.15: c45,30 r1.2
  circle w0.15: c45,-30 r1.2
  circle w0.15: c-45,-30 r1.2
  circle w0.15: c-45,30 r1.2
  lines w0.254: -50,-25.983 ccw(c-41,-25.983) -41,-34.983 ; -50,25.833 cw(c-41,25.833) -41,34.833 -25.726,34.833 -22.822,31.929 -22.822,24.309 -21.044,22.531 -8.725,22.531 -6.82,24.436 -6.82,33.072 -5.008,34.884 41.011,34.884 cw(c41.011,25.884) 50.011,25.884 ; -49.98,-25.983 -49.98,25.833 ; -41,-35 41.059,-35 ; 41,-35 ccw(c41,-26) 50,-26 50,25.895

## Silkscreen, mask and mechanical layers (free items; w line width, h text height)
Top Overlay:
  lines w0.254: -45.5,14 -25.5,14 ; -41.618,22.023 -40.475,23.166 ; -40.475,18.594 -40.475,23.166 ; -39.332,22.023 -40.475,23.166 ; -35.5,4 -35.5,24 ; -25,-23 25,-23 ; -4,5.983 4,5.983 ; 0,29.897 0,34.897 ; -12.455,14.57 12.455,14.57 12.455,29.43 -12.455,29.43 -12.455,14.57
  text "+ -" at 47.506,1.957 h1.52 r270
  text "REMOTE v1.2" at -40.348,-3.215 h3
  text "2024/6/22" at -40.348,-5.755 h3
  text "IO0" at -48.784,-12.867 h2
  text "ON" at 7.023,-32.425 h3
  text "OFF" at -12.154,-32.552 h3
Top Solder:
  circle w1: c45,30 r1.5
  circle w1: c45,-30 r1.5
  circle w1: c-45,-30 r1.5
  circle w1: c-45,30 r1.5
Bottom Solder:
  circle w1: c-45,30 r1.5
  circle w1: c45,30 r1.5
  circle w1: c45,-30 r1.5
  circle w1: c-45,-30 r1.5
Mechanical 5:
  circle w0.254: c0,22 r1.27
  lines w0.254: -12.455,22 12.455,22 ; 0,5.983 0,14.483 ; 0,14.57 0,29.43

## Dimensions
-49.98,25.833 to -44.941,31.2 on Mechanical 5
-45,31.2 to -45.059,28.8 on Mechanical 5
41.011,34.884 to 41.059,-35 on Mechanical 5
-49.98,25.833 to 50,25.895 on Mechanical 5

## Text inside footprints (layer, text, board x,y; h text height)
B1: Top Overlay "-" at -38.022,-15.346 h1.14 r270; Top Overlay "+" at -37.297,-22.066 h1.14 r45
U3: Mechanical 15 "AI" at -19.688,-36.696 h1.2 r73
U4: Mechanical 15 "AI" at 30.312,-36.696 h1.2 r73
X3: Top Overlay "*" at -7.242,20.294 h1.52